# Altium PCB Zillion.PcbDoc
Units mil, origin at the board's own origin, x right, y up, seen from the top; angles counter-clockwise.
Board outline 8180 x 3937.01 mil, 2 copper layers (Top Layer, Bottom Layer), stack 12.8 mil thick; 78 components, 58 nets, 304 pads, 117 vias.
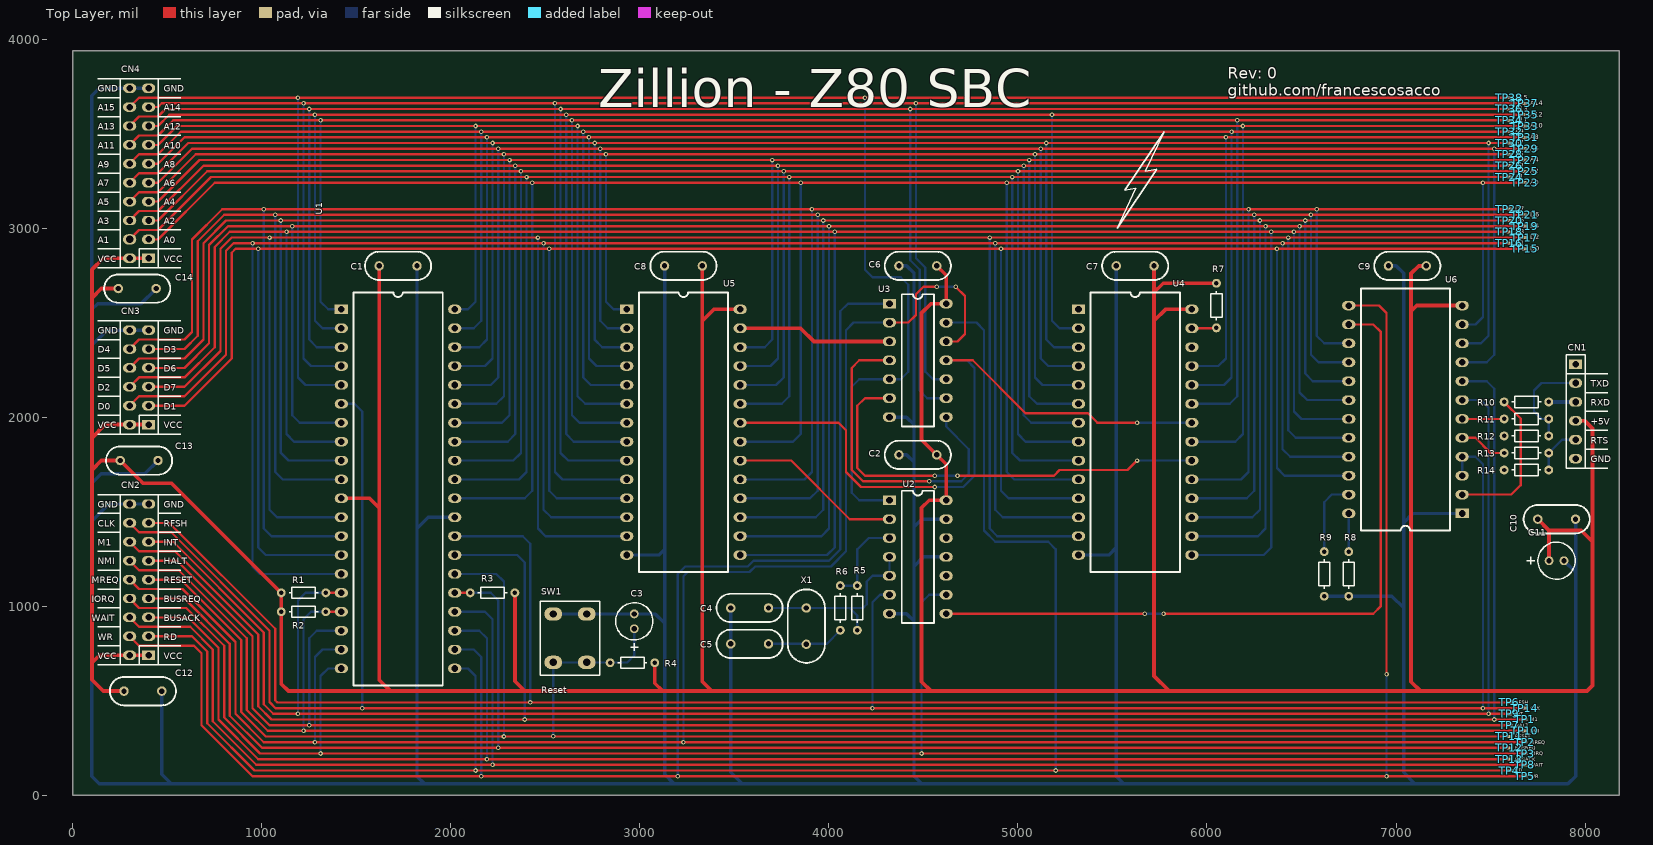
[diagram p0: Top Layer view]
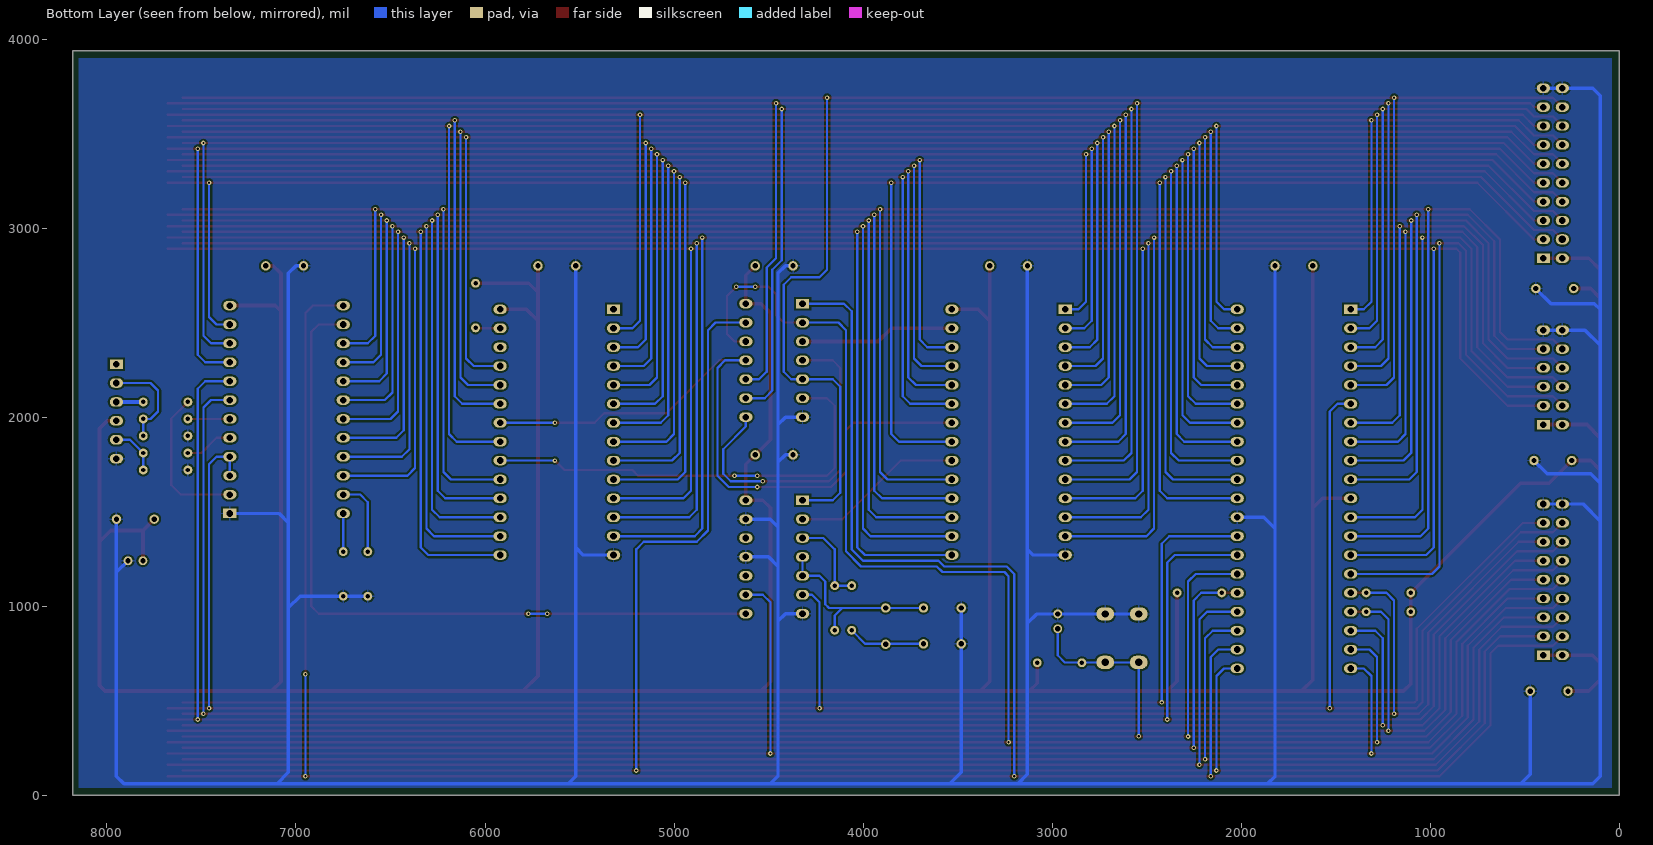
[diagram p1: Bottom Layer view, seen from below]

## Layer stack, top to bottom
Top Solder: solder mask 0.4, Solder Resist, Dk 3.5
Top Layer: signal copper 1.4
Dielectric 1: core 10, FR-4, Dk 4.2
Bottom Layer: signal copper 1.4
Bottom Solder: solder mask 0.4, Solder Resist, Dk 3.5

## Board outline
0,0 8180,0 8180,3937.01 0,3937.01

## Design rules (kind name [scope] priority, off if disabled: settings)
Clearance [All] p1: gap=10
PolygonConnect [All] p1: connectstyle=Relief reliefconductorwidth=10 reliefentries=4 polygonreliefangle="90 Angle" airgapwidth=10
RoutingVias [All] p1: holewidth=28 width=50 viastyle="Through Hole" minholewidth=28 minwidth=50 maxholewidth=28 maxwidth=50
SolderMaskExpansion [All] p1: expansion=4
Width [All] p1: maxlimit=20 minlimit=12 preferedwidth=16
30 further rules are at their usual default settings.

## Classes and differential pairs
component class uart: C9 C10 C11 CN1 R8 R9 R10 R11 R12 R13 R14 U6
component class memory: C6 C7 C8 R7 U2 U3 U4 U5
component class expansion: C12 C13 C14 CN2 CN3 CN4 TP1 TP2 TP3 TP4 TP5 TP6 TP7 TP8 TP9 TP10 TP11 TP12 TP13 TP14 TP15 TP16 TP17 TP18 TP19 TP20 TP21 TP22 TP23 TP24 TP25 TP26 TP27 TP28 TP29 TP30 TP31 TP32 TP33 TP34 TP35 TP36 TP37 TP38
component class cpu: C1 C2 C3 C4 C5 R1 R2 R3 R4 R5 R6 SW1 U1 X1

## Components (designator, comment, footprint, x,y, rotation, side; value= is the part's Value field where it differs from the comment)
C1 "100nF" DiskCapacitor 1820,2800 r180 top
C2 "100nF" DiskCapacitor 4370,1800 r0 top
C3 "10uF 16V - ECA1CM100" "ECA 5x11" 2970,880 r90 top
C4 "22pF" DiskCapacitor 3480,990 r0 top
C5 "22pF" DiskCapacitor 3480,800 r0 top
C6 "100nF" DiskCapacitor 4370,2800 r0 top
C7 "100nF" DiskCapacitor 5520,2800 r0 top
C8 "100nF" DiskCapacitor 3130,2800 r0 top
C9 "100nF" DiskCapacitor 6960,2800 r0 top
C10 "100nF" DiskCapacitor 7950,1460 r180 top
C11 "10uF 16V - ECA1CM100" "ECA 5x11" 7810,1240 r0 top
C12 "100nF" DiskCapacitor 470,550 r180 top
C13 "100nF" DiskCapacitor 450,1770 r180 top
C14 "100nF" DiskCapacitor 440,2680 r180 top
CN1 "103741-6" 103741-6 7950,2280 r270 top
CN2 "146256-9" 146256-9 400,740 r90 top
CN3 "146256-6" 146256-6 400,1960 r90 top
CN4 "1-146256-0" 1-146256-0 400,2840 r90 top
R1 "2K2" CR12 1220,1070 r180 top
R2 "2K2" CR12 1220,970 r180 top
R3 "2K2" CR12 2220,1070 r0 top
R4 "2K2" CR12 2960,700 r0 top
R5 "1M" CR12 4150,990 r270 top
R6 "1K" CR12 4060,990 r90 top
R7 "2K2" CR12 6050,2590 r90 top
R8 "2K2" CR12 6750,1170 r90 top
R9 "2K2" CR12 6620,1170 r90 top
R10 "2K2" CR12 7690,2080 r180 top
R11 "2K2" CR12 7690,1990 r180 top
R12 "6K8" CR12 7690,1900 r0 top
R13 "2K2" CR12 7690,1810 r180 top
R14 "6K8" CR12 7690,1720 r0 top
SW1 "Reset" EVQPAx09K 2630,830 r0 top
TP1 "Test Point" "Test Point Trace" 7680,400 r90 top
TP2 "Test Point" "Test Point Trace" 7680,280 r90 top
TP3 "Test Point" "Test Point Trace" 7680,220 r90 top
TP4 "Test Point" "Test Point Trace" 7600,130 r90 top
TP5 "Test Point" "Test Point Trace" 7680,100 r90 top
TP6 "Test Point" "Test Point Trace" 7600,490 r90 top
TP7 "Test Point" "Test Point Trace" 7600,370 r90 top
TP8 "Test Point" "Test Point Trace" 7680,160 r90 top
TP9 "Test Point" "Test Point Trace" 7600,430 r90 top
TP10 "Test Point" "Test Point Trace" 7680,340 r90 top
TP11 "Test Point" "Test Point Trace" 7600,310 r90 top
TP12 "Test Point" "Test Point Trace" 7600,250 r90 top
TP13 "Test Point" "Test Point Trace" 7600,190 r90 top
TP14 "Test Point" "Test Point Trace" 7680,460 r90 top
TP15 "Test Point" "Test Point Trace" 7680,2890 r90 top
TP16 "Test Point" "Test Point Trace" 7600,2920 r90 top
TP17 "Test Point" "Test Point Trace" 7680,2950 r90 top
TP18 "Test Point" "Test Point Trace" 7600,2980 r90 top
TP19 "Test Point" "Test Point Trace" 7680,3010 r90 top
TP20 "Test Point" "Test Point Trace" 7600,3040 r90 top
TP21 "Test Point" "Test Point Trace" 7680,3070 r90 top
TP22 "Test Point" "Test Point Trace" 7600,3100 r90 top
TP23 "Test Point" "Test Point Trace" 7680,3240 r90 top
TP24 "Test Point" "Test Point Trace" 7600,3270 r90 top
TP25 "Test Point" "Test Point Trace" 7680,3300 r90 top
TP26 "Test Point" "Test Point Trace" 7600,3330 r90 top
TP27 "Test Point" "Test Point Trace" 7680,3360 r90 top
TP28 "Test Point" "Test Point Trace" 7600,3390 r90 top
TP29 "Test Point" "Test Point Trace" 7680,3420 r90 top
TP30 "Test Point" "Test Point Trace" 7600,3450 r90 top
TP31 "Test Point" "Test Point Trace" 7680,3480 r90 top
TP32 "Test Point" "Test Point Trace" 7600,3510 r90 top
TP33 "Test Point" "Test Point Trace" 7680,3540 r90 top
TP34 "Test Point" "Test Point Trace" 7600,3570 r90 top
TP35 "Test Point" "Test Point Trace" 7680,3600 r90 top
TP36 "Test Point" "Test Point Trace" 7600,3630 r90 top
TP37 "Test Point" "Test Point Trace" 7680,3660 r90 top
TP38 "Test Point" "Test Point Trace" 7600,3690 r90 top
U1 "Z80CPU" Z84C00xxPEG 1420,2570 r0 top
U2 "SN74HC04" CDIP14 4470,1260 r0 top
U3 "SN74HC32" CDIP14 4470,2300 r0 top
U4 "AT28C64B-15PU" PDIP28 5320,2570 r0 top
U5 "CY62256N" PDIP28 2930,2570 r0 top
U6 "MC6850" PDIP24 7050,2040 r180 top
X1 "7.3728MHz" HC49S 3880,990 r270 top

## Footprints (in the part's own frame and the unit in brackets; to place one, negate y for a bottom-side part, rotate by r counter-clockwise, add the part's x,y. Pads: shape width x height; smd on the part's side, far side on the other; paste and mask are expansions set on the pad)
1-146256-0 [mil] "CONN Header Breakaway"
  rect 50x70 hole 35: 1(0,0)
  oval 50x70 hole 35: 2(0,100) 3(100,0) 5(200,0) 6(200,100) 7(300,0) 8(300,100) 9(400,0) 10(400,100) 11(500,0) 12(500,100) 13(600,0) 14(600,100) 15(700,0) 16(700,100) 17(800,0) 18(800,100) 19(900,0) 20(900,100)
  oval 55x70 hole 40: 4(100,100)
  silkscreen extent -50,-50 950,150, body extent -50,-46 950,146, height 320
103741-6 [mil] "CONN Breakaway Single Row"
  rect 50x70 hole 35: 1(0,0)
  oval 50x70 hole 35: 2(100,0) 3(200,0) 4(300,0) 5(400,0) 6(500,0)
  silkscreen extent -50,-50 550,50, body extent -50,-46 550,46, height 320
146256-6 [mil] "CONN Header Breakaway"
  rect 50x70 hole 35: 1(0,0)
  oval 50x70 hole 35: 2(0,100) 3(100,0) 4(100,100) 5(200,0) 6(200,100) 7(300,0) 8(300,100) 9(400,0) 10(400,100) 11(500,0) 12(500,100)
  silkscreen extent -50,-50 550,150, body extent -50,-46 550,146, height 320
146256-9 [mil] "CONN Header Breakaway"
  rect 50x70 hole 35: 1(0,0)
  oval 50x70 hole 35: 2(0,100) 3(100,0) 4(100,100) 5(200,0) 6(200,100) 7(300,0) 8(300,100) 9(400,0) 10(400,100) 11(500,0) 12(500,100) 13(600,0) 14(600,100) 15(700,0) 16(700,100) 17(800,0) 18(800,100)
  silkscreen extent -50,-50 850,150, body extent -50,-46 850,146, height 320
CDIP14 [mil]
  rect 70x50 hole 35: 1(-150,300)
  oval 70x50 hole 35: 2(-150,200) 3(-150,100) 4(-150,0) 5(-150,-100) 6(-150,-200) 7(-150,-300) 8(150,-300) 9(150,-200) 10(150,-100) 11(150,0) 12(150,100) 13(150,200) 14(150,300)
  silkscreen extent -85,-350 85,350, body extent -155,-350 155,350, height 100
CR12 [mm] "Through Hole Carbon Film Resistor - 1/8W (0.125W)"
  round 1.2 hole 0.6: 1(-3,0) 2(3,0)
  silkscreen extent -1.98,-0.75 1.95,0.75
DiskCapacitor [mil]
  round 50 hole 28: 1(0,0) 2(200,0)
  silkscreen extent -75,-75 275,75, body extent -60,-20 260,20, height 380
"ECA 5x11" [mm]
  round 1.2 hole 0.7: 1(0,0) 2(2,0)
  silkscreen extent -2.98,-2.5 3.5,2.5, body extent -1.51,-2.51 3.51,2.51, height 11
EVQPAx09K [mm]
  oval 2.4x1.8 hole 1: 1(-2.25,3.25) 2(2.25,3.25) 3(2.25,-3.25) 4(-2.25,-3.25)
  silkscreen extent -4,-5 4,5, body extent -3.1,-3.38 3.1,3.38, height 9.5
HC49S [mil]
  round 50 hole 28: 1(0,0) 2(192.13,0)
  silkscreen extent -98,-98 290,98
PDIP24 [mil]
  rect 70x50 hole 35: 1(-300,550)
  oval 70x50 hole 35: 2(-300,450) 3(-300,350) 4(-300,250) 5(-300,150) 6(-300,50) 7(-300,-50) 8(-300,-150) 9(-300,-250) 10(-300,-350) 11(-300,-450) 12(-300,-550) 13(300,-550) 14(300,-450) 15(300,-350) 16(300,-250) 17(300,-150) 18(300,-50) 19(300,50) 20(300,150) 21(300,250) 22(300,350) 23(300,450) 24(300,550)
  silkscreen extent -236,-640 236,640, body extent -305,-640 305,640, height 100
PDIP28 [mil]
  rect 70x50 hole 35: 1(0,0)
  oval 70x50 hole 35: 2(0,-100) 3(0,-200) 4(0,-300) 5(0,-400) 6(0,-500) 7(0,-600) 8(0,-700) 9(0,-800) 10(0,-900) 11(0,-1000) 12(0,-1100) 13(0,-1200) 14(0,-1300) 15(600,-1300) 16(600,-1200) 17(600,-1100) 18(600,-1000) 19(600,-900) 20(600,-800) 21(600,-700) 22(600,-600) 23(600,-500) 24(600,-400) 25(600,-300) 26(600,-200) 27(600,-100) 28(600,0)
  silkscreen extent 64,-1390 536,90, body extent -5,-1390 605,90, height 100
"Test Point Trace" [mil]
  rrect50% 16x32 smd mask+2: 1(0,0)
Z84C00xxPEG [mil] "Z80 - CPU"
  rect 70x50 hole 35: 1(0,0)
  oval 70x50 hole 35: 2(0,-100) 3(0,-200) 4(0,-300) 5(0,-400) 6(0,-500) 7(0,-600) 8(0,-700) 9(0,-800) 10(0,-900) 11(0,-1000) 12(0,-1100) 13(0,-1200) 14(0,-1300) 15(0,-1400) 16(0,-1500) 17(0,-1600) 18(0,-1700) 19(0,-1800) 20(0,-1900) 21(600,-1900) 22(600,-1800) 23(600,-1700) 24(600,-1600) 25(600,-1500) 26(600,-1400) 27(600,-1300) 28(600,-1200) 29(600,-1100) 30(600,-1000) 31(600,-900) 32(600,-800) 33(600,-700) 34(600,-600) 35(600,-500) 36(600,-400) 37(600,-300) 38(600,-200) 39(600,-100) 40(600,0)
  silkscreen extent 64,-1990 536,90, body extent -5,-1990 605,90, height 100

## Part data
C1 C2 C4 C5 C6 C7 C8 C9 C10 C12 C13 C14: library part Capacitor, "Capacitor"
C3 C11: library part ECA1CM100, "10uF 16V"
CN1: "CONN Breakaway Single Row"
CN2 CN3 CN4: "CONN Header Breakaway"
R1 R2 R3 R4 R7 R8 R9 R10 R11 R12 R13 R14: library part Resistor
R5 R6: library part Resistor, "2K2"
SW1: library part EVQPA, "5N Type Light Touch Switches"
U1: library part Z84C00xxPEG, "Z80 - CPU"
U2: "Hex Inverters"
U3: "Quadruple 2-Input Positive-OR Gates"
U4: "64K (8K x 8) Parallel EEPROM"
U5: "256-Kbit (32 K × 8) Static RAM"
U6: "Asynchronous Communications Interface Adapter (ACIA)"
X1: library part HC49S, "Crystal HC49S"

## Via types
v1: diameter 24, hole 12, Top Layer to Bottom Layer, 117 vias

## Nets (pads, with @x,y where several pads share a name; then routed paths per layer and width w, separated by ;. In a path a pad name is that pad's centre, name@x,y a point inside that pad or via, vN(x,y) a via of type N, cw(c..) or ccw(c..) an arc to the next point about the centre after c; other vN are vias at no path point)
A0: CN4.3 TP23.1 U1.30 U4.10 U5.21 U6.11 | length 14000.5
  Top Layer w12: CN4.3 450,2940 750,3240 2540,3240 3960,3240 ; v1(3850,3240) v1(4940,3240) TP23.1
  Bottom Layer w12: U1.30 2390,1570 2430,1610 v1(2430,3240) ; U5.21 3810,1870 3850,1910 v1(3850,3240) ; v1(4940,3240) 4940,1710 4980,1670 U4.10 ; U6.11 7420,2490 7460,2530 v1(7460,3240)
A1: CN4.4 TP24.1 U1.31 U4.9 U5.23 | length 12766.4
  Top Layer w12: CN4.4 350,2990 450,2990 730,3270 2510,3270 3900,3270 ; v1(3790,3270) TP24.1
  Bottom Layer w12: U1.31 2360,1670 2400,1710 v1(2400,3270) ; U5.23 3750,2070 3790,2110 v1(3790,3270) ; v1(4970,3270) 4970,1810 5010,1770 U4.9
A2: CN4.5 TP25.1 U1.32 U4.8 U5.24 | length 12417.4
  Top Layer w12: CN4.5 450,3040 710,3300 2480,3300 3870,3300 ; v1(3760,3300) TP25.1
  Bottom Layer w12: U1.32 2330,1770 2370,1810 v1(2370,3300) ; U5.24 3720,2170 3760,2210 v1(3760,3300) ; v1(5000,3300) 5000,1910 5040,1870 U4.8
A3: CN4.6 TP26.1 U1.33 U4.7 U5.25 | length 12149.8
  Top Layer w12: CN4.6 350,3090 450,3090 690,3330 2450,3330 3840,3330 ; v1(3730,3330) TP26.1
  Bottom Layer w12: U1.33 2300,1870 2340,1910 v1(2340,3330) ; U5.25 3690,2270 3730,2310 v1(3730,3330) ; v1(5030,3330) 5030,2010 5070,1970 U4.7
A4: CN4.7 TP27.1 U1.34 U4.6 U5.26 | length 11800.8
  Top Layer w12: CN4.7 450,3140 670,3360 2420,3360 3810,3360 ; v1(3700,3360) TP27.1
  Bottom Layer w12: U1.34 2270,1970 2310,2010 v1(2310,3360) ; U5.26 3660,2370 3700,2410 v1(3700,3360) ; v1(5060,3360) 5060,2110 5100,2070 U4.6
A5: CN4.8 TP28.1 U1.35 U4.5 U5.1 | length 11403.3
  Top Layer w12: CN4.8 350,3190 450,3190 650,3390 2390,3390 2930,3390 ; v1(2820,3390) TP28.1
  Bottom Layer w12: U1.35 2240,2070 2280,2110 v1(2280,3390) ; v1(2820,3390) 2820,2610 2860,2570 U5.1 ; v1(5090,3390) 5090,2210 5130,2170 U4.5
A6: CN4.9 TP29.1 U1.36 U4.4 U5.2 U6.9 | length 12591.8
  Top Layer w12: CN4.9@400,3241 CN4.9 450,3240 630,3420 2360,3420 2900,3420 ; v1(2790,3420) v1(5120,3420) TP29.1
  Bottom Layer w12: U1.36 2210,2170 2250,2210 v1(2250,3420) ; v1(2790,3420) 2790,2510 2830,2470 U5.2 ; v1(5120,3420) 5120,2310 5160,2270 U4.4 ; U6.9 7480,2290 7520,2330 v1(7520,3420)
A7: CN4.10 TP30.1 U1.37 U4.3 U5.3 U6.10 | length 12483.3
  Top Layer w12: CN4.10 350,3290 450,3290 610,3450 2330,3450 2870,3450 ; v1(2760,3450) v1(5150,3450) TP30.1
  Bottom Layer w12: U1.37 2180,2270 2220,2310 v1(2220,3450) ; v1(2760,3450) 2760,2410 2800,2370 U5.3 ; v1(5150,3450) 5150,2410 5190,2370 U4.3 ; U6.10 7450,2390 7490,2430 v1(7490,3450)
A8: CN4.11 TP31.1 U1.38 U4.25 U5.4 | length 11457.7
  Top Layer w12: CN4.11 450,3340 590,3480 2300,3480 2840,3480 ; v1(2730,3480) TP31.1
  Bottom Layer w12: U1.38 2150,2370 2190,2410 v1(2190,3480) ; v1(2730,3480) 2730,2310 2770,2270 U5.4 ; U4.25 6060,2270 6100,2310 v1(6100,3480)
A9: CN4.12 TP32.1 U1.39 U4.24 U5.5 | length 11710.1
  Top Layer w12: CN4.12 350,3390 450,3390 570,3510 2270,3510 2810,3510 ; v1(2700,3510) TP32.1
  Bottom Layer w12: U1.39 2120,2470 2160,2510 v1(2160,3510) ; v1(2700,3510) 2700,2210 2740,2170 U5.5 ; U4.24 6090,2170 6130,2210 v1(6130,3510)
A10: CN4.13 TP33.1 U1.40 U4.21 U5.6 | length 12111.1
  Top Layer w12: CN4.13 450,3440 550,3540 2240,3540 2780,3540 ; v1(2670,3540) TP33.1
  Bottom Layer w12: U1.40 2090,2570 2130,2610 v1(2130,3540) ; v1(2670,3540) 2670,2110 2710,2070 U5.6 ; U4.21 6150,1870 6190,1910 v1(6190,3540)
A11: CN4.14 TP34.1 U1.1 U4.23 U5.7 | length 12133.6
  Top Layer w12: CN4.14 350,3490 450,3490 530,3570 1420,3570 2750,3570 ; v1(2640,3570) TP34.1
  Bottom Layer w12: v1(1310,3570) 1310,2610 1350,2570 U1.1 ; v1(2640,3570) 2640,2010 2680,1970 U5.7 ; U4.23 6120,2070 6160,2110 v1(6160,3570)
A12: CN4.15 TP35.1 U1.2 U4.2 U5.8 | length 11934.6
  Top Layer w12: CN4.15 450,3540 510,3600 1390,3600 2720,3600 ; v1(2610,3600) TP35.1
  Bottom Layer w12: v1(1280,3600) 1280,2510 1320,2470 U1.2 ; v1(2610,3600) 2610,1910 2650,1870 U5.8 ; v1(5180,3600) 5180,2510 5220,2470 U4.2
A13: CN4.16 TP36.1 U1.3 U3.9 U5.9 | length 12707.7
  Top Layer w12: CN4.16 350,3590 450,3590 490,3630 1360,3630 2690,3630 ; v1(2580,3630) TP36.1
  Bottom Layer w12: v1(1250,3630) 1250,2410 1290,2370 U1.3 ; v1(2580,3630) 2580,1810 2620,1770 U5.9 ; v1(4430,3630) 4430,2830 4480,2780 4480,2140 4520,2100 U3.9
A14: CN4.17 TP37.1 U1.4 U3.10 U5.10 | length 12878.7
  Top Layer w12: CN4.17 450,3640 470,3660 1330,3660 2660,3660 ; v1(2550,3660) TP37.1
  Bottom Layer w12: v1(1220,3660) 1220,2310 1260,2270 U1.4 ; v1(2550,3660) 2550,1710 2590,1670 U5.10 ; v1(4460,3660) 4460,2840 4510,2790 4510,2240 4550,2200 U3.10
A15: CN4.18 TP38.1 U1.5 U2.1 U3.5 | length 11790.1
  Top Layer w12: CN4.18 350,3690 1300,3690 TP38.1
  Bottom Layer w12: v1(1190,3690) 1190,2210 1230,2170 U1.5 ; v1(4190,3690) 4190,2780 4230,2740 4380,2740 4420,2700 4420,2240 4380,2200 U3.5 4160,2200 4120,2160 4120,1600 4160,1560 U2.1
B\U\S\A\C\K\: CN2.5 TP13.1 U1.23 | length 8559.8
  Top Layer w12: CN2.5 610,940 770,780 770,400 980,190 TP13.1
  Bottom Layer w12: U1.23 2150,870 2190,830 v1(2190,190)
B\U\S\R\E\Q\: CN2.7 R3.1 TP12.1 U1.25 | length 8776.4
  Top Layer w12: CN2.7 590,1040 830,800 830,420 1000,250 TP12.1 ; U1.25 R3.1
  Bottom Layer w12: R3.1 2210,1070 2250,1030 v1(2250,250)
CLK: CN2.16 TP14.1 U1.6 U2.6 U6.3 U6.4 | length 11997.1
  Top Layer w12: CN2.16 350,1390 520,1390 1040,870 1040,492 1072,460 1640,460 4340,460 ; v1(4230,460) TP14.1
  Bottom Layer w12: U1.6 1490,2070 1530,2030 v1(1530,460) ; v1(4230,460) 4230,1020 4270,1060 U2.6 ; U6.3 U6.4 7420,1790 7460,1750 v1(7460,460)
D0: CN3.3 TP15.1 U1.14 U4.11 U5.11 U6.22 | length 15068.1
  Top Layer w12: CN3.3 590,2060 840,2310 840,2870 860,2890 2630,2890 ; v1(2520,2890) v1(4910,2890) TP15.1
  Bottom Layer w12: v1(980,2890) 980,1310 1020,1270 U1.14 ; v1(2520,2890) 2520,1610 2560,1570 U5.11 ; v1(4910,2890) 4910,1610 4950,1570 U4.11 ; v1(6370,2890) 6370,1730 6410,1690 U6.22
D1: CN3.4 TP16.1 U1.15 U4.12 U5.12 U6.21 | length 15474.7
  Top Layer w12: CN3.4 350,2110 590,2110 810,2330 810,2880 850,2920 2600,2920 ; v1(2490,2920) v1(4880,2920) TP16.1
  Bottom Layer w12: v1(950,2920) 950,1210 990,1170 U1.15 ; v1(2490,2920) 2490,1510 2530,1470 U5.12 ; v1(4880,2920) 4880,1510 4920,1470 U4.12 ; v1(6400,2920) 6400,1830 6440,1790 U6.21
D2: CN3.5 TP17.1 U1.12 U4.13 U5.13 U6.20 | length 15279.8
  Top Layer w12: CN3.5 590,2160 780,2350 780,2890 840,2950 2570,2950 ; v1(2460,2950) v1(4850,2950) TP17.1
  Bottom Layer w12: v1(1040,2950) 1040,1510 1080,1470 U1.12 ; v1(2460,2950) 2460,1410 2500,1370 U5.13 ; v1(4850,2950) 4850,1410 4890,1370 U4.13 ; v1(6430,2950) 6430,1930 6470,1890 U6.20
D3: CN3.6 TP18.1 U1.8 U4.15 U5.15 U6.19 | length 14986.4
  Top Layer w12: CN3.6 350,2210 590,2210 750,2370 750,2900 830,2980 4140,2980 ; v1(4030,2980) v1(6340,2980) TP18.1
  Bottom Layer w12: v1(1130,2980) 1130,1910 1170,1870 U1.8 ; U5.15 3990,1270 4030,1310 v1(4030,2980) ; U4.15 6300,1270 6340,1310 v1(6340,2980) ; v1(6460,2980) 6460,2030 6500,1990 U6.19
D4: CN3.7 TP19.1 U1.7 U4.16 U5.16 U6.18 | length 14531.5
  Top Layer w12: CN3.7 590,2260 720,2390 720,2910 820,3010 4110,3010 ; v1(4000,3010) v1(6310,3010) TP19.1
  Bottom Layer w12: v1(1160,3010) 1160,2010 1200,1970 U1.7 ; U5.16 3960,1370 4000,1410 v1(4000,3010) ; U4.16 6270,1370 6310,1410 v1(6310,3010) ; v1(6490,3010) 6490,2130 6530,2090 U6.18
D5: CN3.8 TP20.1 U1.9 U4.17 U5.17 U6.17 | length 14548.1
  Top Layer w12: CN3.8 350,2310 590,2310 690,2410 690,2920 810,3040 4080,3040 ; v1(3970,3040) v1(6280,3040) TP20.1
  Bottom Layer w12: v1(1100,3040) 1100,1810 1140,1770 U1.9 ; U5.17 3930,1470 3970,1510 v1(3970,3040) ; U4.17 6240,1470 6280,1510 v1(6280,3040) ; v1(6520,3040) 6520,2230 6560,2190 U6.17
D6: CN3.9 TP21.1 U1.10 U4.18 U5.18 U6.16 | length 14353.3
  Top Layer w12: CN3.9 590,2360 660,2430 660,2930 800,3070 4050,3070 ; v1(3940,3070) v1(6250,3070) TP21.1
  Bottom Layer w12: v1(1070,3070) 1070,1710 1110,1670 U1.10 ; U5.18 3900,1570 3940,1610 v1(3940,3070) ; U4.18 6210,1570 6250,1610 v1(6250,3070) ; v1(6550,3070) 6550,2330 6590,2290 U6.16
D7: CN3.10 TP22.1 U1.13 U4.19 U5.19 U6.15 | length 14469.8
  Top Layer w12: CN3.10 350,2410 590,2410 630,2450 630,2940 790,3100 4020,3100 ; v1(3910,3100) v1(6220,3100) TP22.1
  Bottom Layer w12: v1(1010,3100) 1010,1410 1050,1370 U1.13 ; U5.19 3870,1670 3910,1710 v1(3910,3100) ; U4.19 6180,1670 6220,1710 v1(6220,3100) ; v1(6580,3100) 6580,2430 6620,2390 U6.15
GND: C1.1 C2.1 C3.2 C4.1 C5.1 C6.1 C7.1 C8.1 C9.1 C10.1 C11.2 C12.1 C13.1 C14.1 CN1.6 CN2.17 CN2.18 CN3.11 CN3.12 CN4.19 CN4.20 R8.1 R9.1 R12.1 R14.1 SW1.1 SW1.2 U1.29 U2.7 U2.11 U2.13 U3.7 U4.14 U5.14 U6.1 | length 33021.6
  Bottom Layer w18: CN2.17 CN2.18 190,1540 100,1450 ; CN3.11 CN3.12 180,2460 100,2380 ; CN4.19 CN4.20 140,3740 100,3700 100,2570 ; C14.1 360,2600 130,2600 100,2570 ; C13.1 380,1700 150,1700 100,1650 ; C12.1 470,110 520,60 ; C1.1 1820,1410 ; 1860,60 1820,100 1820,1410 ; U1.29 1880,1470 1820,1410 ; SW1.1 SW1.2 3082.05,957.95 3130,910 ; U5.14 3100,1270 3130,1300 ; C8.1 3130,1300 ; 3290,60 1970,60 520,60 ; C4.1 C5.1 3480,120 3540,60 ; U2.7 4410,960 4450,920 ; U3.7 4410,2000 4450,1960 ; C2.1 4410,1800 4450,1760 ; C6.1 4410,2800 4450,2760 4450,1960 ; U2.11 4500,1260 4450,1210 ; U2.13 4490,1460 4450,1420 ; U4.14 5480,1270 5520,1310 ; C7.1 5520,1310 ; R9.1 R8.1 6978.11,1051.89 7040,990 ; C9.1 7000,2800 7040,2760 7040,1440 ; 7130,60 5560,60 ; U6.1 7090,1490 7040,1440 ; C11.2 7950,1178.74 ; C10.1 7950,1178.74 ; 100,1450 100,100 140,60 520,60 ; 100,1450 100,1650 ; 100,1650 100,2380 ; 100,2380 100,2570 ; 3130,910 3130,1300 ; 3130,910 3130,110 3180,60 3540,60 ; 3540,60 4490,60 ; 4450,920 4450,1210 ; 4450,920 4450,100 4490,60 ; 4450,1210 4450,1420 ; 4450,1420 4450,1760 ; 4450,1760 4450,1960 ; 4490,60 5450,60 5560,60 ; 5520,1310 5520,100 5560,60 ; 7040,990 7040,1440 ; 7040,990 7040,120 7100,60 7910,60 7950,100 7950,1178.74
H\A\L\T\: CN2.11 TP7.1 U1.18 | length 8429.5
  Top Layer w12: CN2.11 550,1240 950,840 950,460 1040,370 TP7.1
  Bottom Layer w12: v1(1250,370) 1250,830 1290,870 U1.18
I\N\T\: CN2.13 R1.1 TP9.1 U1.16 U6.7 | length 10422.7
  Top Layer w12: CN2.13 530,1340 1010,860 1010,480 1060,430 1300,430 TP9.1 ; R1.1 U1.16
  Bottom Layer w12: v1(1190,430) 1190,1030 1230,1070 R1.1 ; U6.7 7450,2090 7490,2050 v1(7490,430)
I\O\R\Q\: CN2.8 TP3.1 U1.20 U2.9 | length 9425.4
  Top Layer w12: CN2.8 350,990 600,990 800,790 800,410 990,220 1420,220 TP3.1
  Bottom Layer w12: v1(1310,220) 1310,630 1350,670 U1.20 ; v1(4490,220) 4490,1020 4530,1060 U2.9
M1: CN2.14 TP1.1 U1.27 U6.8 | length 11145.1
  Top Layer w12: CN2.14 350,1290 540,1290 980,850 980,470 1050,400 2500,400 TP1.1
  Bottom Layer w12: U1.27 2350,1270 2390,1230 v1(2390,400) ; U6.8 7480,2190 7520,2150 v1(7520,400)
M\R\E\Q\: CN2.10 TP2.1 U1.19 U3.2 U3.12 | length 12655.1
  Top Layer w12: CN2.10 350,1090 580,1090 860,810 860,430 1010,280 1390,280 TP2.1 ; U3.2 4420,2500 4460,2540 4460,2650 4500,2690 v1(4570,2690) ; U3.12 4680,2400 4720,2440 4720,2640 v1(4670,2690)
  Bottom Layer w12: v1(1280,280) 1280,730 1320,770 U1.19 ; v1(3230,280) 3230,1158 3252,1180 3580,1180 3610,1210 4010,1210 4090,1290 4090,2460 4130,2500 U3.2 ; v1(4570,2690) v1(4670,2690)
N\M\I\: CN2.12 R2.1 TP10.1 U1.17 | length 8782
  Top Layer w12: CN2.12 350,1190 560,1190 920,830 920,450 1030,340 TP10.1 ; R2.1 U1.17
  Bottom Layer w12: v1(1220,340) 1220,930 1260,970 R2.1
NetC4_2: C4.2 R5.2 U2.4 U2.5 X1.1 | length 1015.4
  Bottom Layer w12: C4.2 X1.1 4110,990 ; R5.2 4150,950 4110,990 ; U2.4 U2.5 4230,1160 4200,1130 4200,1010 4180,990 4110,990
NetC5_2: C5.2 R6.1 X1.2 | length 409.8
  Bottom Layer w12: C5.2 3988.11,800 R6.1
NetR5_1: R5.1 R6.2 U2.3 | length 476.7
  Bottom Layer w12: R6.2 R5.1 4150,1300 4210,1360 U2.3
NetR7_1: R7.1 U4.27 | length 128.1
  Top Layer w12: U4.27 R7.1@6048.11,2470
NetR8_2: R8.2 U6.24 | length 201.9
  Bottom Layer w12: R8.2 U6.24
NetR9_2: R9.2 U6.23 | length 408.5
  Bottom Layer w12: R9.2 6620,1550 6660,1590 U6.23
NetR10_2: R10.2 U6.2 | length 807.2
  Top Layer w12: U6.2 7610,1590 7660,1640 7660,1991.89 R10.2
NetR11_2: R11.2 U6.6 | length 221.9
  Top Layer w12: U6.6 R11.2
NetR13_2: R13.2 U6.5 | length 255
  Top Layer w12: U6.5 7420,1890 7500,1810 R13.2
NetU2_8: U2.8 U6.14 | length 3953.1
  Top Layer w12: U2.8 v1(5670,960) ; v1(5770,960) 6880,960 6920,1000 6920,2450 6880,2490 U6.14
  Bottom Layer w12: v1(5670,960) v1(5770,960)
NetU3_3: U3.3 U5.27 | length 819
  Top Layer w20: U5.27 3850,2470 3920,2400 U3.3
NetU3_4: U3.4 U3.8 | length 1767.7
  Top Layer w12: U3.4 4160,2300 4120,2260 4120,1720 4180,1660 v1(4530,1660)
  Bottom Layer w12: v1(4530,1660) 4700,1660 4740,1700 4740,1830 4620,1950 U3.8
NetU3_11: U3.11 U4.22 U5.22 | length 3707.8
  Top Layer w12: U5.22 4050,1970 4090,1930 4090,1710 4170,1630 v1(4560,1630) ; U3.11 4760,2300 5040,2020 5370,2020 5420,1970 v1(5630,1970)
  Bottom Layer w12: v1(4560,1630) 4710,1630 4770,1690 4770,2260 4730,2300 U3.11 ; v1(5630,1970) U4.22
R\D\: CN2.3 TP4.1 U1.21 U3.13 | length 11211.2
  Top Layer w12: CN2.3 630,840 710,760 710,380 960,130 2240,130 TP4.1
  Bottom Layer w12: U1.21 2090,670 2130,630 v1(2130,130) ; U3.13 4780,2500 4820,2460 4820,1400 4880,1340 5160,1340 5200,1300 v1(5200,130)
R\E\S\E\T\: C3.1 CN2.9 R4.1 SW1.3 SW1.4 TP11.1 U1.26 | length 9837.9
  Top Layer w12: CN2.9 570,1140 890,820 890,440 1020,310 2390,310 TP11.1
  Bottom Layer w12: U1.26 2240,1170 2280,1130 v1(2280,310) ; v1(2541.42,311.42) SW1.4 SW1.3 2932.05,702.05 2970,740 C3.1
R\F\S\H\: CN2.15 TP6.1 U1.28 | length 9071.5
  Top Layer w12: CN2.15 510,1440 1070,880 1070,502 1082,490 TP6.1
  Bottom Layer w12: U1.28 2380,1370 2420,1330 v1(2420,490)
RAMCS: U2.2 U5.20 | length 918.4
  Top Layer w12: U5.20 3800,1770 4110,1460 U2.2
ROMCS: U3.6 U4.20 | length 2336.3
  Top Layer w12: U3.6 4190,2100 4150,2060 4150,1730 4190,1690 v1(4560,1690) ; v1(4680,1690) 5190,1690 5220,1720 5580,1720 v1(5630,1770)
  Bottom Layer w12: v1(4560,1690) v1(4680,1690) ; v1(5630,1770) U4.20
RTS: CN1.5 R13.1 R14.2 | length 260.9
  Bottom Layer w12: R14.2 R13.1 7878.11,1880 CN1.5
RXD: CN1.3 R10.1 | length 141.9
  Bottom Layer w20: R10.1 CN1.3
TXD: CN1.2 R11.1 R12.2 | length 531.2
  Bottom Layer w12: R12.2 R11.1 7770,1990 7730,2030 7730,2140 7770,2180 CN1.2
VCC: C1.2 C2.2 C6.2 C7.2 C8.2 C9.2 C10.2 C11.1 C12.2 C13.2 C14.2 CN1.4 CN2.1 CN2.2 CN3.1 CN3.2 CN4.1 CN4.2 R1.2 R2.2 R3.2 R4.2 R7.2 U1.11 U2.14 U3.14 U4.28 U5.28 U6.12 | length 27943.2
  Top Layer w20: C14.2 150,2680 100,2630 ; C12.2 160,550 100,610 100,700 ; CN2.1 CN2.2 140,740 100,700 ; CN3.1 CN3.2 170,1960 100,1890 ; CN4.1 CN4.2 160,2840 100,2780 100,2630 ; U1.11 1570,1570 1620,1520 ; C1.2 1620,1520 ; R3.2 2338.11,601.89 2390,550 ; R4.2 3078.11,591.89 3120,550 ; 3330,2510 3390,2570 U5.28 ; C8.2 3330,600 3380,550 ; C6.2 4620,2750 U3.14 4540,2600 4490,2550 4490,1880 C2.2 4620,1750 U2.14 4530,1560 4490,1520 4490,600 4540,550 ; C7.2 5720,2660 ; U4.28 5780,2570 5720,2510 ; R7.2 5768.11,2708.11 5720,2660 ; 7130,550 7080,600 7080,2560 ; C9.2 7120,2800 7080,2760 7080,2560 ; U6.12 7110,2590 7080,2560 ; C10.2 7810,1400 ; C11.1 7810,1400 ; CN1.4 8000,1980 8040,1940 8040,1340 ; 100,700 100,1720 ; 100,1720 100,1890 ; 100,1720 150,1770 C13.2 370,1650 521.89,1650 R1.2 R2.2 1101.89,588.11 1140,550 1680,550 ; 100,1890 100,2630 ; 1620,1520 1620,610 1680,550 ; 1680,550 3380,550 ; 3380,550 4540,550 ; 4540,550 5800,550 ; 5720,2510 5720,2660 ; 5720,2510 5720,630 5800,550 ; 5800,550 8010,550 8040,580 8040,1340 ; 7810,1400 7980,1400 8040,1340
W\A\I\T\: CN2.6 TP8.1 U1.24 | length 8912.3
  Top Layer w12: CN2.6 350,890 620,890 740,770 740,390 970,160 TP8.1
  Bottom Layer w12: U1.24 2180,970 2220,930 v1(2220,160)
W\R\: CN2.4 TP5.1 U1.22 U3.1 U6.13 | length 14992.7
  Top Layer w12: CN2.4 350,790 640,790 680,750 680,370 950,100 2270,100 3310,100 ; v1(3200,100) TP5.1 ; U6.13 6910,2590 6950,2550 v1(6950,640)
  Bottom Layer w12: U1.22 2120,770 2160,730 v1(2160,100) ; v1(3200,100) 3200,1170 3240,1210 3570,1210 3600,1240 4000,1240 4060,1300 4060,2560 4100,2600 U3.1 ; v1(6950,100) v1(6950,640)
pads on no net: CN1.1 U2.10 U2.12 U4.1 U4.26

## Polygon pours and split planes (outlines as drawn)
GND on Bottom Layer "GND" (solid, remove dead copper, pour order 2): 39.37,3897.64 39.37,39.37 8149.61,39.37 8149.61,3897.64

## Silkscreen, mask and mechanical layers (free items; w line width, h text height)
Top Overlay:
  lines w7.87: 130,690 250,690 ; 130,790 250,790 ; 130,890 250,890 ; 130,990 250,990 ; 130,1090 250,1090 ; 130,1190 250,1190 ; 130,1290 250,1290 ; 130,1390 250,1390 ; 130,1490 250,1490 ; 130,1590 250,1590 ; 130,1910 250,1910 ; 130,2010 250,2010 ; 130,2110 250,2110 ; 130,2210 250,2210 ; 130,2310 250,2310 ; 130,2410 250,2410 ; 130,2510 250,2510 ; 130,2790 250,2790 ; 130,2890 250,2890 ; 130,2990 250,2990 ; 130,3090 250,3090 ; 130,3190 250,3190 ; 130,3290 250,3290 ; 130,3390 250,3390 ; 130,3490 250,3490 ; 130,3590 250,3590 ; 130,3690 250,3690 ; 130,3790 250,3790 ; 450,690 570,690 ; 450,790 570,790 ; 450,890 570,890 ; 450,990 570,990 ; 450,1090 570,1090 ; 450,1190 570,1190 ; 450,1290 570,1290 ; 450,1390 570,1390 ; 450,1490 570,1490 ; 450,1590 570,1590 ; 450,1910 570,1910 ; 450,2010 570,2010 ; 450,2110 570,2110 ; 450,2210 570,2210 ; 450,2310 570,2310 ; 450,2410 570,2410 ; 450,2510 570,2510 ; 450,2790 570,2790 ; 450,2890 570,2890 ; 450,2990 570,2990 ; 450,3090 570,3090 ; 450,3190 570,3190 ; 450,3290 570,3290 ; 450,3390 570,3390 ; 450,3490 570,3490 ; 450,3590 570,3590 ; 450,3690 570,3690 ; 450,3790 570,3790 ; 8000,1730 8120,1730 ; 8000,1830 8120,1830 ; 8000,1930 8120,1930 ; 8000,2030 8120,2030 ; 8000,2130 8120,2130 ; 8000,2230 8120,2230 ; 5524.19,3000 5734.19,3310 5674.19,3300 5775,3510 5564.19,3200 5624.19,3210 5524.19,3000
  text "Rev: 0" at 6110,3790 h60
  text "GND" at 130,3720 h35
  text "GND" at 480,3720 h35
  text "github.com/francescosacco" at 6110,3700 h60
  text "A15" at 7630,3680 h25
  text "A14" at 7710,3650 h25
  text "Zillion - Z80 SBC" at 2780,3640 h200
  text "A15" at 130,3620 h35
  text "A14" at 480,3620 h35
  text "A13" at 7630,3620 h25
  text "A12" at 7710,3590 h25
  text "A11" at 7630,3560 h25
  text "A10" at 7710,3530 h25
  text "A13" at 130,3520 h35
  text "A12" at 480,3520 h35
  text "A9" at 7630,3500 h25
  text "A8" at 7710,3470 h25
  text "A7" at 7630,3440 h25
  text "A11" at 130,3420 h35
  text "A10" at 480,3420 h35
  text "A6" at 7710,3410 h25
  text "A5" at 7630,3380 h25
  text "A4" at 7710,3350 h25
  text "A9" at 130,3320 h35
  text "A8" at 480,3320 h35
  text "A3" at 7630,3320 h25
  text "A2" at 7710,3290 h25
  text "A1" at 7630,3260 h25
  text "A0" at 7710,3230 h25
  text "A7" at 130,3220 h35
  text "A6" at 480,3220 h35
  text "A5" at 130,3120 h35
  text "A4" at 480,3120 h35
  text "D7" at 7630,3090 h25
  text "D6" at 7710,3060 h25
  text "D5" at 7630,3030 h25
  text "A3" at 130,3020 h35
  text "A2" at 480,3020 h35
  text "D4" at 7710,3000 h25
  text "D3" at 7630,2970 h25
  text "D2" at 7710,2940 h25
  text "A1" at 130,2920 h35
  text "A0" at 480,2920 h35
  text "D1" at 7630,2910 h25
  text "D0" at 7710,2880 h25
  text "VCC" at 130,2820 h35
  text "VCC" at 480,2820 h35
  text "GND" at 130,2440 h35
  text "GND" at 480,2440 h35
  text "D4" at 130,2340 h35
  text "D3" at 480,2340 h35
  text "D5" at 130,2240 h35
  text "D6" at 480,2240 h35
  text "TXD" at 8030,2160 h35
  text "D2" at 130,2140 h35
  text "D7" at 480,2140 h35
  text "RXD" at 8030,2060 h35
  text "D0" at 130,2040 h35
  text "D1" at 480,2040 h35
  text "+5V" at 8030,1960 h35
  text "VCC" at 130,1940 h35
  text "VCC" at 480,1940 h35
  text "RTS" at 8030,1860 h35
  text "GND" at 8030,1760 h35
  text "GND" at 130,1520 h35
  text "GND" at 480,1520 h35
  text "CLK" at 130,1420 h35
  text "RFSH" at 480,1420 h35
  text "M1" at 130,1320 h35
  text "INT" at 480,1320 h35
  text "NMI" at 130,1220 h35
  text "HALT" at 480,1220 h35
  text "MREQ" at 100,1120 h35
  text "RESET" at 480,1120 h35
  text "IORQ" at 100,1020 h35
  text "BUSREQ" at 480,1020 h35
  text "WAIT" at 100,920 h35
  text "BUSACK" at 480,920 h35
  text "WR" at 130,820 h35
  text "RD" at 480,820 h35
  text "VCC" at 130,720 h35
  text "VCC" at 480,720 h35
  text "RFSH" at 7630,480 h20
  text "CLK" at 7710,450 h20
  text "INT" at 7630,420 h20
  text "M1" at 7710,390 h20
  text "HALT" at 7630,360 h20
  text "NMI" at 7710,330 h20
  text "RESET" at 7630,300 h20
  text "MREQ" at 7710,270 h20
  text "BUSREQ" at 7630,240 h20
  text "IORQ" at 7710,210 h20
  text "BUSACK" at 7630,180 h20
  text "WAIT" at 7710,150 h20
  text "RD" at 7630,120 h20
  text "WR" at 7710,90 h20
Mechanical 1:
  the board outline again, w7.87